# EAGLE board Circuitos en Serie y Paralelo (EAGLE 9.7.0)

Size 146.95 x 81.73 mm. Coordinates in mm from the lower left corner, seen from the top.
Outline: 0,0 146.95,0 146.95,81.73 0,81.73 0,0
Copper layers (1*16): Top 0.035mm / dielectric 1.5mm / Bottom 0.035mm
Design rules "default": minimum track width 6mil, minimum drill 0.35mm, track to track 6mil, track to pad 6mil, pad to pad 6mil, via to via 6mil, smd to smd 6mil, copper to edge 40mil, drill to drill 6mil, minimum pad ring 10mil, minimum via ring 8mil, stop-mask expansion 4mil, vias tented up to drill 0mil, thermal gap 10mil

## Footprints (pad centres in the part's own frame; a part is rotated, then mirrored left to right if it is on the bottom)
BATTERY-GENERIC = drill 1.118 pad 3.15 octagon: + 2.54,0; - -2.54,0
1X02 = drill 1.016 long: 1 -1.27,0; 2 1.27,0
SWITCH-SPDT-PTH-8.5X3.7MM = drill 1.016 pad 1.88: 1 -2.54,0; 2 0,0; 3 2.54,0

## Placement (x,y rotation side)
BAT1  9V  [BATTERY-GENERIC]  9.06,71.84 90 top
BAT2  9V  [BATTERY-GENERIC]  8.26,8.26 90 top
L1  LIGHTBULB  [1X02]  43.15,73.87 0 top
L2  LIGHTBULB  [1X02]  60.77,75.45 0 top
L3  LIGHTBULB  [1X02]  79.51,75.45 0 top
L4  LIGHTBULB  [1X02]  97.34,74.33 0 top
L5  LIGHTBULB  [1X02]  51.71,7.16 270 top
L6  LIGHTBULB  [1X02]  80.16,6.71 270 top
L7  LIGHTBULB  [1X02]  111.09,6.71 270 top
L8  LIGHTBULB  [1X02]  140.67,6.93 270 top
S1  TOGGLE  [SWITCH-SPDT-PTH-8.5X3.7MM]  26.22,74.1 0 top
S2  TOGGLE  [SWITCH-SPDT-PTH-8.5X3.7MM]  23.05,13.42 0 top

## Library data of the parts
BAT1 BAT2 L1-L8 S1 S2 = Tinkercad

## Nets
BAT1+: BAT1.+ S1.2
BAT1-: BAT1.- L4.2
BAT2+: BAT2.+ S2.2
BAT2-: BAT2.- L5.2 L6.2 L7.2 L8.2
L1_2: L1.2 L2.1
L2_2: L2.2 L3.1
L3_2: L3.2 L4.1
S1_S: L1.1 S1.3
S2_S: L5.1 L6.1 L7.1 L8.1 S2.3

## Tracks (layer width: path | path; a pad name or v marks a point on that pad's centre or on a via)
BAT1+  (1 unrouted)
BAT1-  (1 unrouted)
BAT2+  (1 unrouted)
BAT2-  (4 unrouted)
L1_2  (1 unrouted)
L2_2  (1 unrouted)
L3_2  (1 unrouted)
S1_S  (1 unrouted)
S2_S  (4 unrouted)